# Altium PCB PCB1.PcbDoc (part 1 of 2)
Units mil, origin at the board's own origin, x right, y up, seen from the top; angles counter-clockwise.
Board outline 7000 x 5000 mil, 3 copper layers (Top Layer, GND, Bottom Layer), stack 19.578 mil thick; 137 components, 117 nets, 425 pads, 17 vias.
Unrouted connection lines stored in the file: 185.
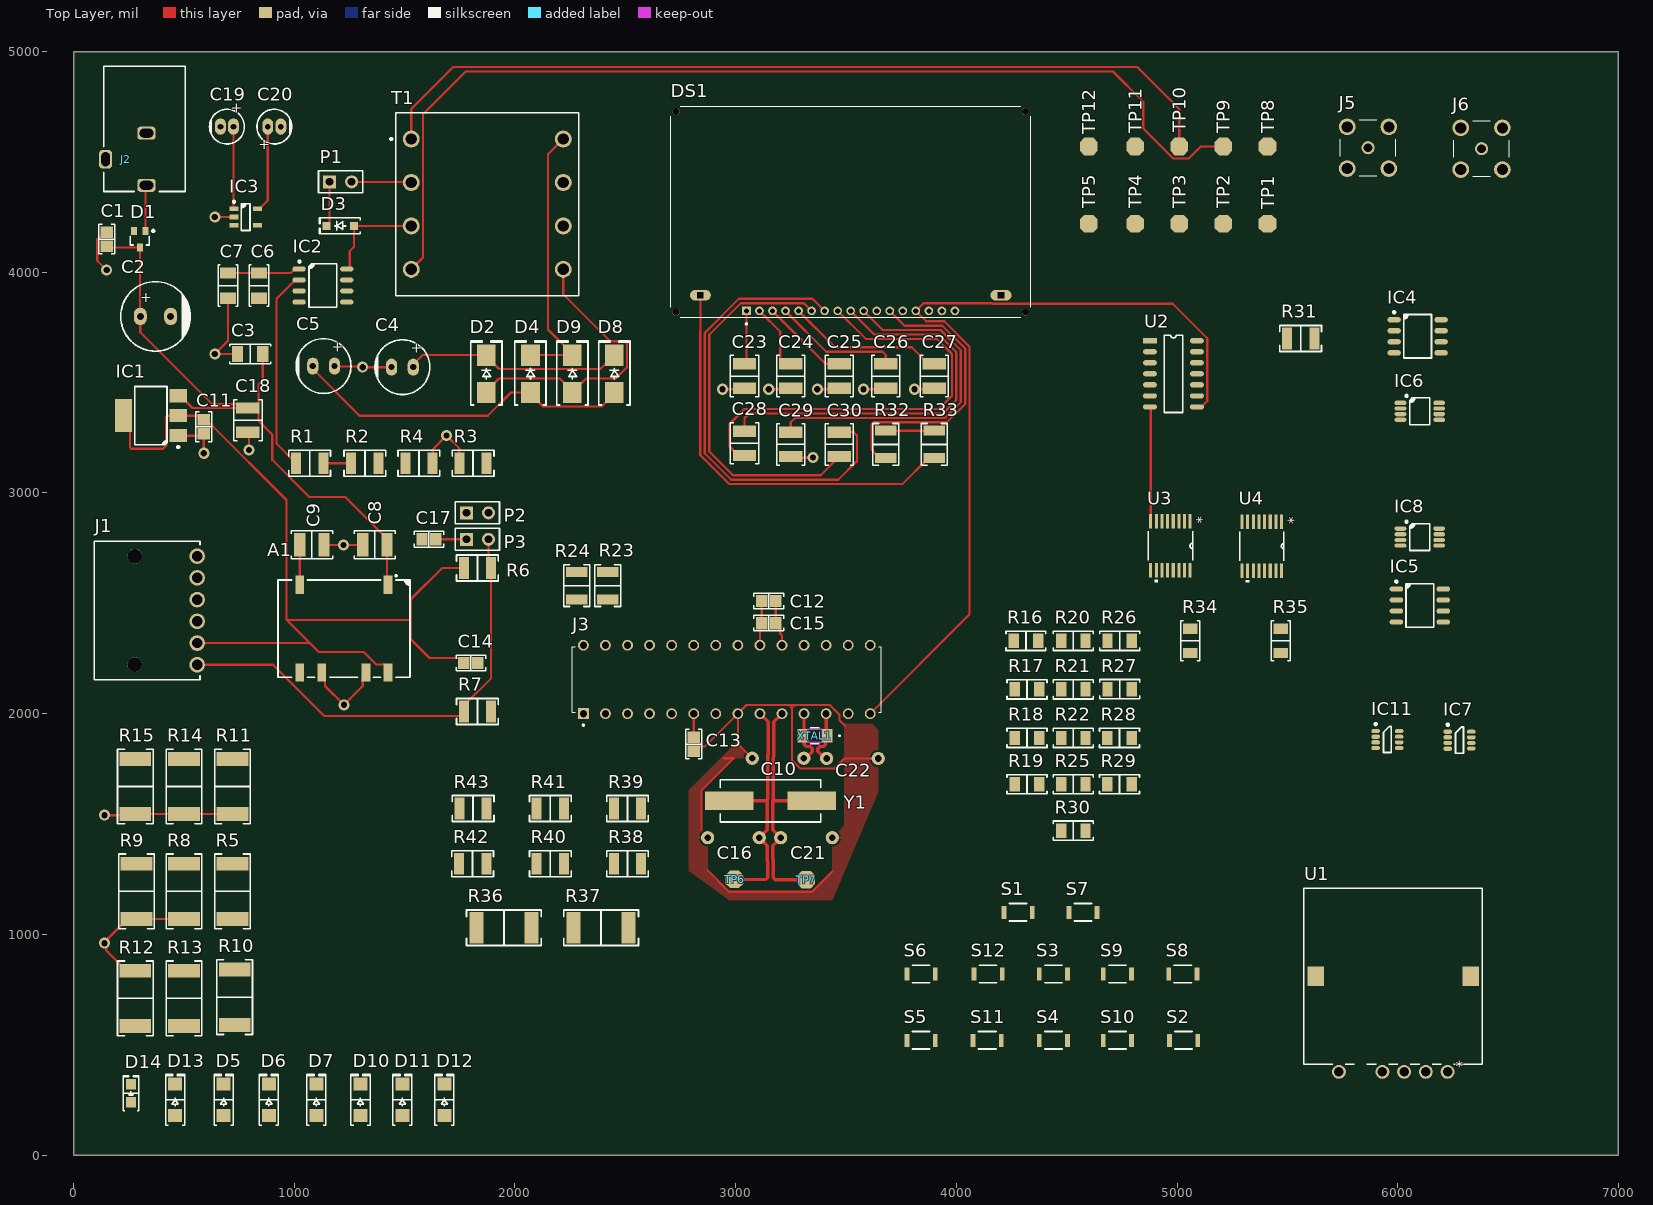
[diagram p0: Top Layer view]
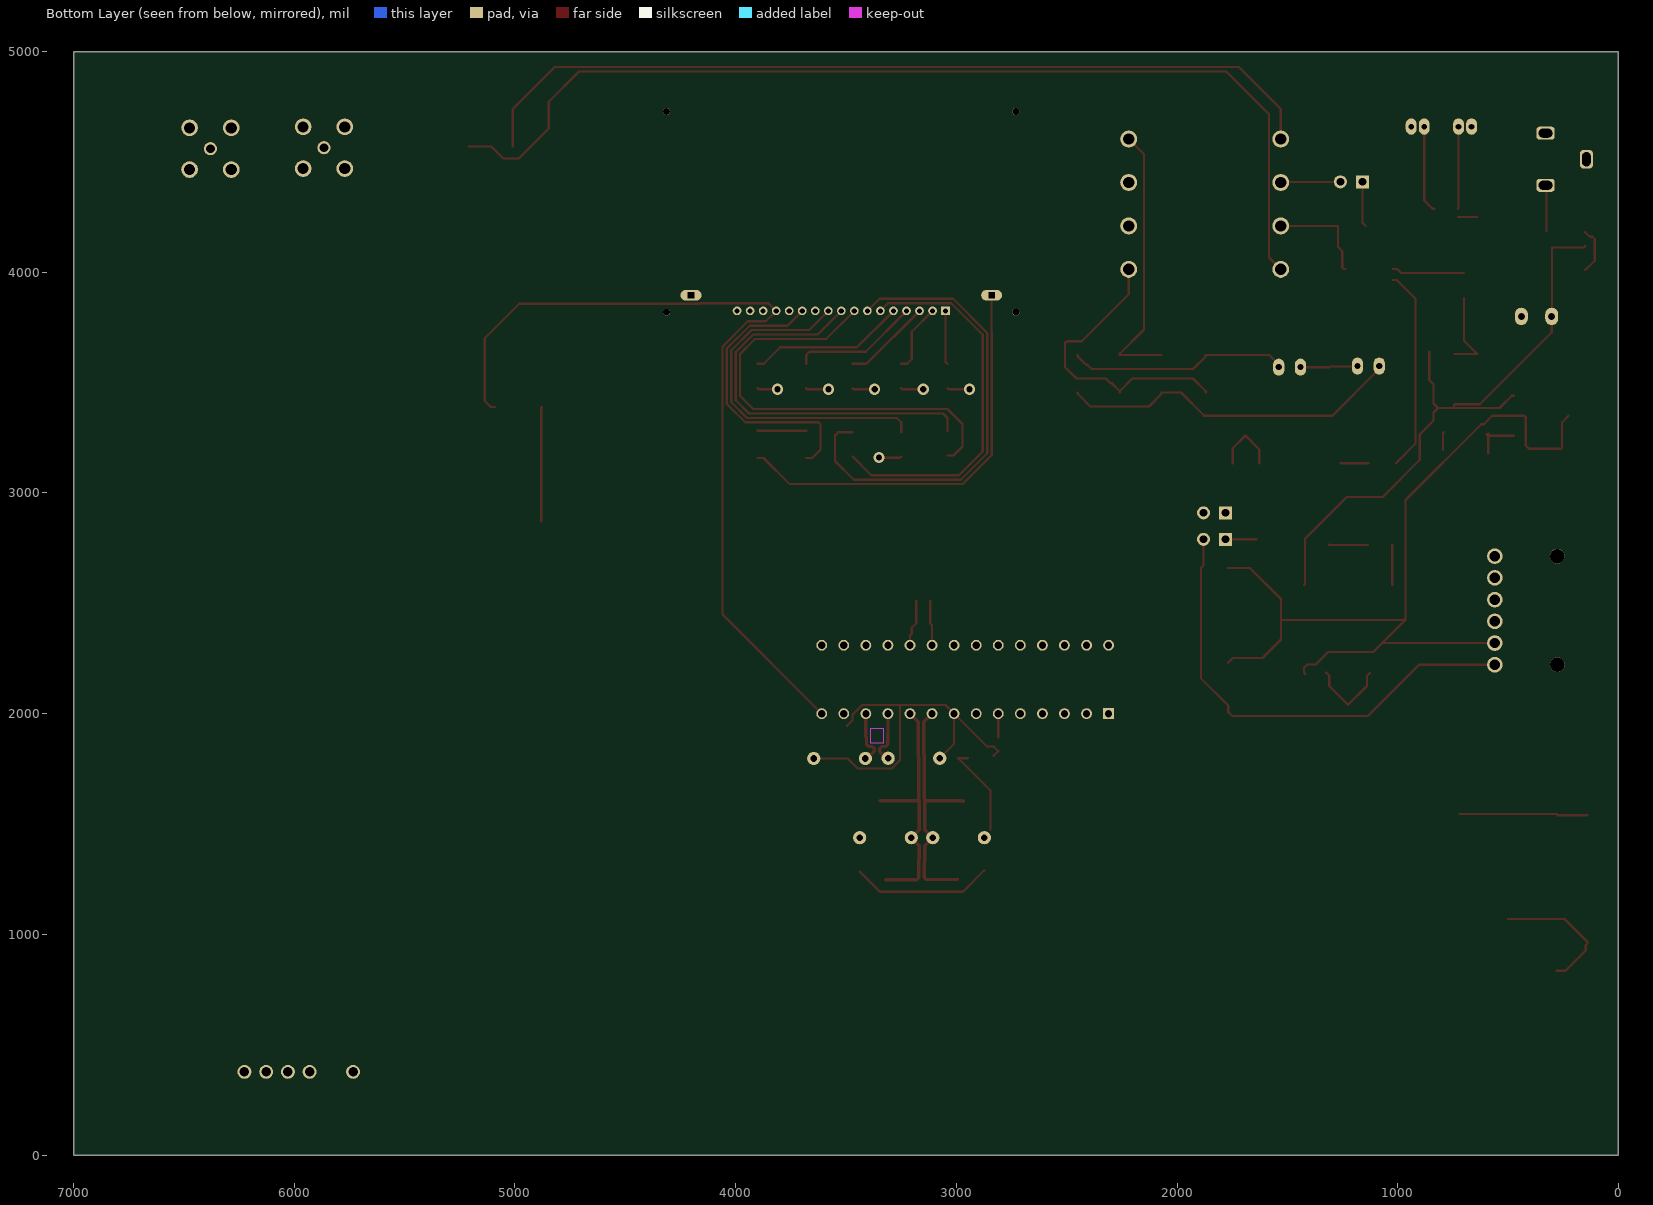
[diagram p1: Bottom Layer view, seen from below]
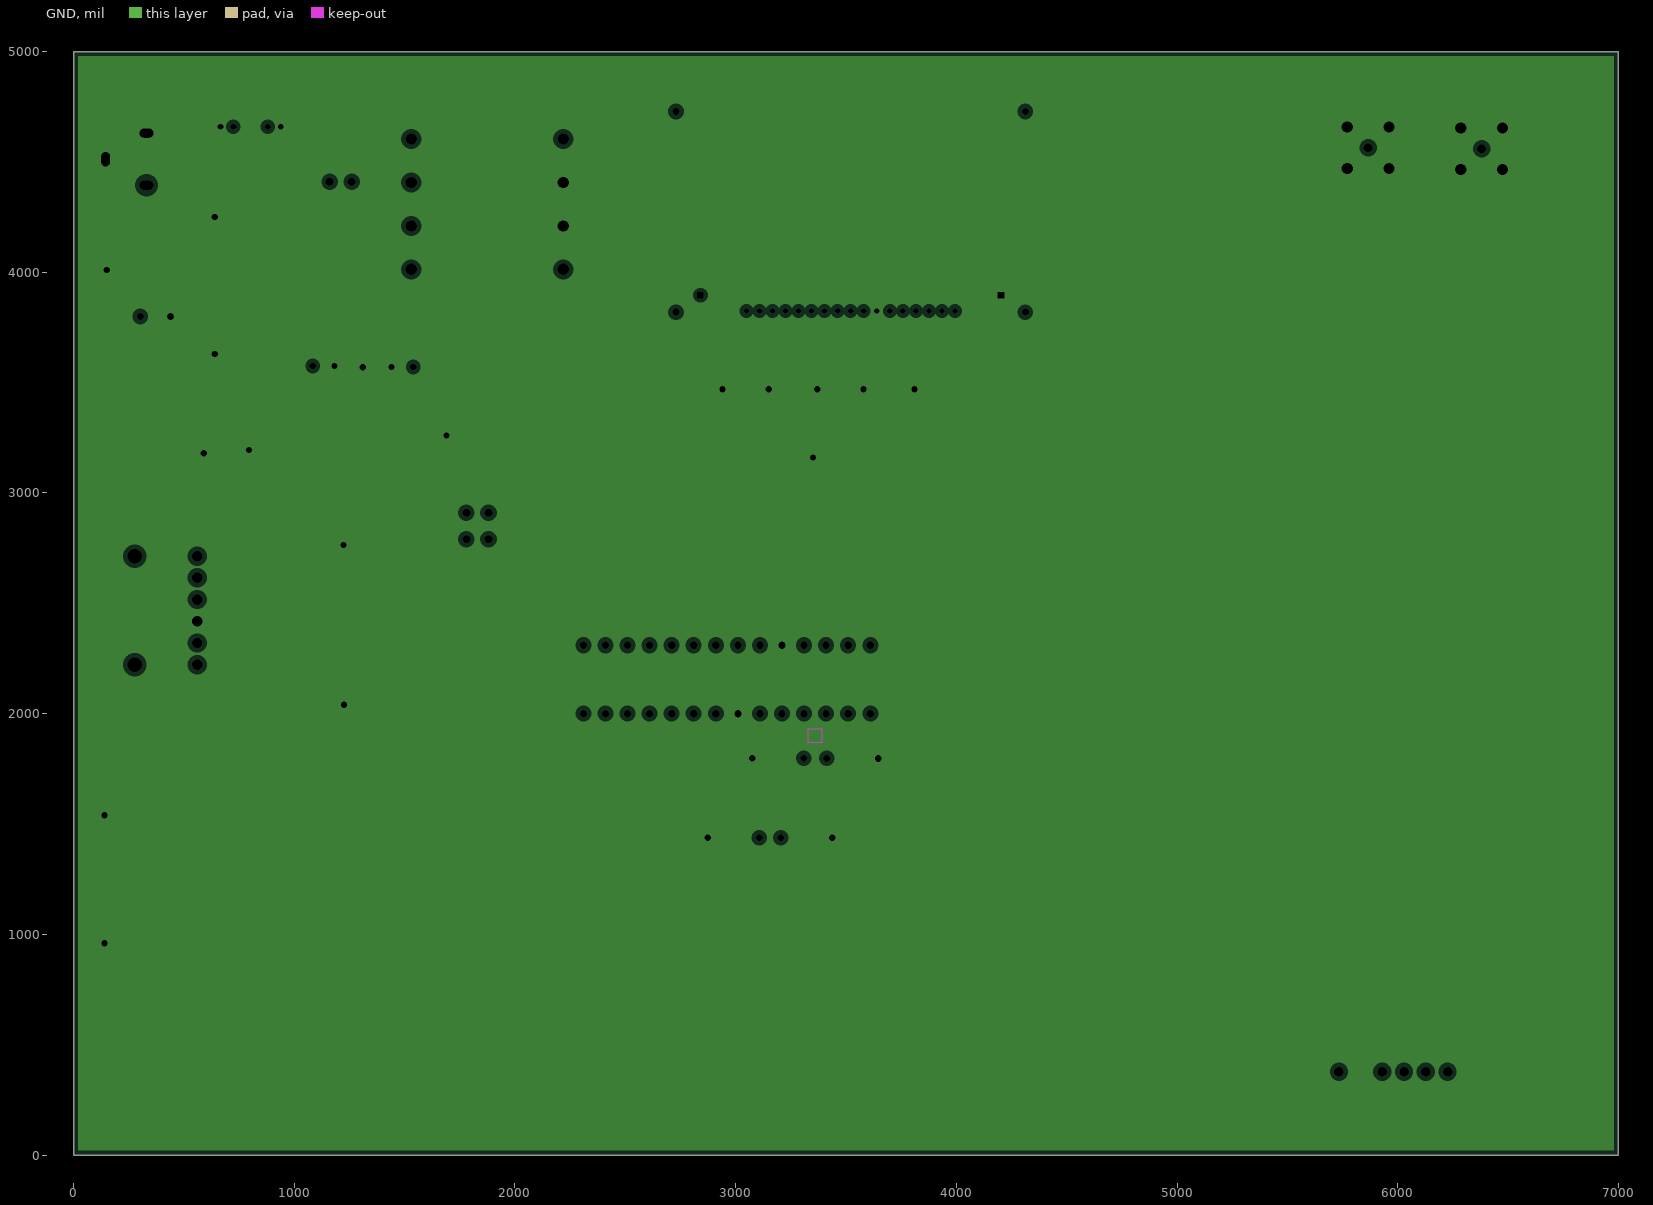
[diagram p2: GND, clearances drawn from the general rule]

## Layer stack, top to bottom
Top Solder: solder mask 0.4, Solder Resist, Dk 3.5
Top Layer: signal copper 1.4
Dielectric 2: prepreg 2.8, PP-006, Dk 4.1
GND: plane copper 1.378, net GND
Dielectric 1: dielectric 12.6, FR-4, Dk 4.8
Bottom Layer: signal copper 1.4
Bottom Solder: solder mask 0.4, Solder Resist, Dk 3.5

## Board outline
0,0 7000,0 7000,5000 0,5000

## Design rules (kind name [scope] priority, off if disabled: settings)
Clearance [All] p1: gap=10 ignorepadtopadclearanceinfootprint=FALSE except(0: Arc-Hole Track-Hole SMDPad-Hole THPad-Hole Via-Hole Fill-Hole Poly-Hole Region-Hole Text-Hole)
DiffPairsRouting X_DiffPair_DiffPairsRouting [InDifferentialPair ('X')] p1: maxlimit=10 minlimit=10 mostfreqgap=10 toplayer_minwidth=15 toplayer_maxwidth=15 toplayer_prefwidth=15 bottomlayer_minwidth=15 bottomlayer_maxwidth=15 bottomlayer_prefwidth=15 maxuncoupledlength=500
DiffPairsRouting [All] p2: maxlimit=10 minlimit=10 mostfreqgap=10 toplayer_minwidth=15 toplayer_maxwidth=15 toplayer_prefwidth=15 bottomlayer_minwidth=15 bottomlayer_maxwidth=15 bottomlayer_prefwidth=15 maxuncoupledlength=500
MatchedLengths X_DiffPair_MatchedLengths [InDifferentialPair ('X')] p1: tolerance=1000 checknetsindiffpair=TRUE checkdiffpairvsdiffpair=FALSE checkxsignals=FALSE checkothers=FALSE
PlaneClearance [All] p1: clearance=20
PlaneConnect [All] p1: planeconnectstyle=Relief reliefexpansion=20 reliefentries=4 reliefconductorwidth=10 reliefairgap=10
PolygonConnect [All] p1: connectstyle=Relief reliefconductorwidth=10 reliefentries=4 polygonreliefangle="90 Angle" airgapwidth=10
RoutingVias [All] p1: holewidth=28 width=50 viastyle="Through Hole" minholewidth=28 minwidth=50 maxholewidth=28 maxwidth=50
SolderMaskExpansion [All] p1: expansion=4 istentingtop=FALSE
Width [All] p1: maxlimit=10 minlimit=10 preferedwidth=10
27 further rules are at their usual default settings.

## Classes and differential pairs
net class Y_P: Y_P
net class Y_N: Y_N
net class X_P: X_P
net class X_N: X_N
component class "Shift register map": C23 C24 C25 C26 C27 C28 C29 C30 DS1 R31 R32 R33 R34 R35 U2 U3 U4
component class "Power management": A1 C1 C2 C3 C4 C5 C6 C7 C8 C9 C18 C19 C20 D1 D2 D3 D4 D5 D6 D7 D8 D9 D10 D11 D12 IC1 IC2 IC3 J2 P1 R1 R2 R3 R4 R5 R8 R9 R10 R11 R12 R13 R14 R15 T1 TP1 TP2 TP3 TP4 TP5 TP6 TP7 TP8 TP9 TP10 TP11 TP12
component class PIC: C10 C11 C12 C13 C14 C15 C16 C17 C21 C22 D13 D14 J1 J3 P2 P3 R6 R7 R23 R24 R36 R37 R38 R39 R40 R41 R42 R43 XTAL1 Y1
component class Oscillator: IC4 IC5 IC6 IC8 J5 J6
component class Interface: IC7 IC11 R16 R17 R18 R19 R20 R21 R22 R25 R26 R27 R28 R29 R30 S1 S2 S3 S4 S5 S6 S7 S8 S9 S10 S11 S12 U1
differential pair Y_Y: +Y_P -Y_N
differential pair X: +X_P -X_N

## Components (designator, comment, footprint, x,y, rotation, side; value= is the part's Value field where it differs from the comment)
A1 "V7806-1000-SMT-TR" "CUI V78" 1225,2385 r270 top
C1 "0.1 µF" "CAP 0805_2012" 150,4150 r270 top
C2 "2.2 µF" "CAP AL TH D8 L3.5 H12.5" 371.1,3800 r0 top
C3 "1µF" "CAP 1206_3216 - 1.0MM" 800,3630 r0 top
C4 "47µF" "CAP TH ALUM ELEC D6.30mm S2.50mm H12.70mm" 1490,3570 r0 top
C5 "47µF" "CAP TH ALUM ELEC D6.30mm S2.50mm H12.70mm" 1133,3575 r0 top
C6 "0.047 µF" "CAP 1206_3216 - 0.8MM" 840,3940 r90 top
C7 "4700 pF" "CAP 1206_3216 - 0.8MM" 700,3940 r90 top
C8 "10 µF" "CAP 1210_3225 - 1MM" 1365,2765 r0 top
C9 "22µF" "CAP 1210_3225 - 2.8MM" 1079.88,2765 r180 top
C10 "15pF" "CAP MICA 27PF" 3192,1798 r0 top
C11 "0.1 µF" "CAP 0805_2012" 590,3300 r270 top
C12 "0.1 µF" "CAP 0805_2012" 3150,2510 r180 top
C13 "0.1 µF" "CAP 0805_2012" 2810,1861.5 r90 top
C14 "0.1 µF" "CAP 0805_2012" 1800,2230 r180 top
C15 "0.1 µF" "CAP 0805_2012" 3150,2410 r180 top
C16 "27pF" "CAP MICA 27PF" 2990,1438 r0 top
C17 "0.1 µF" "CAP 0805_2012" 1610,2790 r0 top
C18 "0.1 µF" "CAP 1210_3225 - 1MM" 790,3330 r90 top
C19 "1µF" "CAP TH ALUM ELEC D4.00mm S1.50mm H6.00mm" 695,4660 r0 top
C20 "4.7µF" "CAP TH ALUM ELEC D4.00mm S1.50mm H6.00mm" 909.53,4660 r180 top
C21 "27pF" "CAP MICA 27PF" 3321,1438 r180 top
C22 "15pF" "CAP MICA 27PF" 3529,1797 r180 top
C23 "0.1 µF" "CAP 1210_3225 - 1MM" 3040,3530 r270 top
C24 "0.1 µF" "CAP 1210_3225 - 1MM" 3250,3530 r270 top
C25 "0.1 µF" "CAP 1210_3225 - 1MM" 3470,3530 r270 top
C26 "0.1 µF" "CAP 1210_3225 - 1MM" 3680,3530 r270 top
C27 "0.1 µF" "CAP 1210_3225 - 1MM" 3900,3530 r270 top
C28 "1 µF" "CAP 1210_3225 - 1MM" 3040,3225.12 r90 top
C29 "1 µF" "CAP 1210_3225 - 1MM" 3250,3220 r90 top
C30 "1 µF" "CAP 1210_3225 - 1MM" 3470,3220 r90 top
D1 "M1MA141KT1G" "DIODES SOT-323-3" 300,4150 r270 top
D2 "MBRS140T3G" "DO214AA SMB" 1870,3540 r90 top
D3 "1N4148W-7-F" SOD-123 1207.99,4210 r180 top
D4 "MBRS140T3G" "DO214AA SMB" 2070,3540 r90 top
D5 "Green" "LED 1206_3216 GREEN" 680,250 r90 top
D6 "Green" "LED 1206_3216 GREEN" 885,250 r90 top
D7 "Green" "LED 1206_3216 GREEN" 1100,250 r90 top
D8 "MBRS140T3G" "DO214AA SMB" 2450,3540 r90 top
D9 "MBRS140T3G" "DO214AA SMB" 2260,3540 r90 top
D10 "Green" "LED 1206_3216 GREEN" 1300,250 r90 top
D11 "Green" "LED 1206_3216 GREEN" 1490,250 r90 top
D12 "Green" "LED 1206_3216 GREEN" 1680,250 r90 top
D13 "Green" "LED 1206_3216 GREEN" 460,250 r90 top
D14 "Yellow" "LED 0805_2012 YELLOW" 260,280 r90 top
DS1 "NHD-C12832A1Z-FSW-FBW-3V3" LCD_NHD-C12832A1Z-FSW-FBW-3V3 3521.22,4273.82 r0 top
IC1 "LD1117S33TR" "ST SOT-223" 350,3350 r180 top
IC2 "CS5171EDR8G" "ON SEMI SO-8" 1130,3940 r0 top
IC3 "TPS76350DBVR" "TI SOT-23-5 DBV" 780,4250 r0 top
IC4 "LM2904DR" "TI SOIC-8 D" 6090,3710 r0 top
IC5 "LM2904DR" "TI SOIC-8 D" 6100,2490 r0 top
IC6 "DAC081S101CIMM/NOPB" "TI VSSOP-8 DGK" 6100,3370 r0 top
IC7 "AD5160BRJZ100-R2" "ANALOG SOT-23-8 RJ-8" 6280,1880 r0 top
IC8 "DAC081S101CIMM/NOPB" "TI VSSOP-8 DGK" 6100,2800 r0 top
IC11 "AD5160BRJZ100-R2" "ANALOG SOT-23-8 RJ-8" 5953.15,1882.8 r0 top
J1 "1053131106" "MOLEX 1053131106" 315.91,2467.64 r90 top
J2 "PJ-102AH" "CUI PJ-102AH" 330,4650 r0 top
J3 "PIC18F24J11-I/SP" DIP787W45P254L3556H508Q28 2960,2155 r90 top
J5 "SMA_CONNECTOR" LPRS_SMA_CONNECTOR 5865.51,4564.49 r270 top
J6 "SMA_CONNECTOR" LPRS_SMA_CONNECTOR 6380,4560 r270 top
P1 "Header 2" HDR1X2 1160,4410 r0 top
P2 "Header 2" HDR1X2 1780,2910 r0 top
P3 "Header 2" HDR1X2 1780,2790 r0 top
R1 "715 Ohms" "RES 1210_3225" 1070,3135 r0 top
R2 "10 kOhms" "RES 1210_3225" 1320,3135 r0 top
R3 "1.27 kOhms" "RES 1210_3225" 1810,3135 r0 top
R4 "2 kOhms" "RES 1210_3225" 1565,3135 r180 top
R5 "100 Ohms" "RES 2512_6432" 720,1195 r90 top
R6 "10 kOhms" "RES 1210_3225" 1830,2660 r180 top
R7 "470 kOhms" "RES 1210_3225" 1830,2010 r180 top
R8 "28 Ohms" "RES 2512_6432" 500,1195 r90 top
R9 "215 kOhms" "RES 2512_6432" 285,1195 r90 top
R10 "100 Ohms" "RES 2512_6432" 730,715 r270 top
R11 "215 kOhms" "RES 2512_6432" 720,1670 r90 top
R12 "100 Ohms" "RES 2512_6432" 280,710 r90 top
R13 "215 kOhms" "RES 2512_6432" 500,710 r90 top
R14 "82 Ohms" "RES 2512_6432" 500,1670 r90 top
R15 "130 Ohms" "RES 2512_6432" 280,1670 r90 top
R16 "3.3 MOhms" "RES 1206_3216" 4315.12,2330 r0 top
R17 "3.3 kOhms" "RES 1206_3216" 4320,2110 r0 top
R18 "3.3 MOhms" "RES 1206_3216" 4320,1890 r0 top
R19 "3.3 MOhms" "RES 1206_3216" 4320,1680 r0 top
R20 "3.3 MOhms" "RES 1206_3216" 4530,2330 r0 top
R21 "3.3 MOhms" "RES 1206_3216" 4530,2110 r0 top
R22 "3.3 MOhms" "RES 1206_3216" 4530,1890 r0 top
R23 "30 Ohms" "RES 1210_3225" 2420,2580 r90 top
R24 "30 Ohms" "RES 1210_3225" 2280,2580 r90 top
R25 "3.3 MOhms" "RES 1206_3216" 4530,1680 r0 top
R26 "3.3 MOhms" "RES 1206_3216" 4740,2330 r0 top
R27 "3.3 MOhms" "RES 1206_3216" 4740,2111 r0 top
R28 "3.3 MOhms" "RES 1206_3216" 4739,1890 r0 top
R29 "3.3 MOhms" "RES 1206_3216" 4739,1680 r0 top
R30 "3.3 MOhms" "RES 1206_3216" 4530,1470 r0 top
R31 "820 kOhms" "RES 1210_3225" 5560,3700 r0 top
R32 "10 kOhms" "RES 1210_3225" 3680,3220 r90 top
R33 "10 kOhms" "RES 1210_3225" 3900,3220 r90 top
R34 "40.2 kOhms" "RES 1206_3216" 5060,2330 r270 top
R35 "40.2 kOhms" "RES 1206_3216" 5470,2330 r270 top
R36 "28 Ohms" "RES 2512_6432" 1950,1030 r180 top
R37 "28 Ohms" "RES 2512_6432" 2390,1030 r0 top
R38 "10 kOhms" "RES 1210_3225" 2510,1320 r180 top
R39 "10 kOhms" "RES 1210_3225" 2510,1570 r180 top
R40 "10 kOhms" "RES 1210_3225" 2160,1320 r180 top
R41 "10 kOhms" "RES 1210_3225" 2160,1570 r180 top
R42 "10 kOhms" "RES 1210_3225" 1807.99,1320 r180 top
R43 "10 kOhms" "RES 1210_3225" 1810,1570 r180 top
S1 "KXT 331 LHS" "C&K KXT3" 4280,1100 r0 top
S2 "KXT 331 LHS" "C&K KXT3" 5030,520 r0 top
S3 "KXT 331 LHS" "C&K KXT3" 4440,820 r0 top
S4 "KXT 331 LHS" "C&K KXT3" 4440,520 r0 top
S5 "KXT 331 LHS" "C&K KXT3" 3840,520 r0 top
S6 "KXT 331 LHS" "C&K KXT3" 3840,820 r0 top
S7 "KXT 331 LHS" "C&K KXT3" 4573.98,1100 r0 top
S8 "KXT 331 LHS" "C&K KXT3" 5026.02,820 r0 top
S9 "KXT 331 LHS" "C&K KXT3" 4730,820 r0 top
S10 "KXT 331 LHS" "C&K KXT3" 4730,520 r0 top
S11 "KXT 331 LHS" "C&K KXT3" 4140,520 r0 top
S12 "KXT 331 LHS" "C&K KXT3" 4143.98,820 r0 top
T1 "Ui = 30-57V, Uo1 = 12V/5A, Uo2 = -12V/1.6A" WE-PoE++_EFD20_THT_L21.08W21.08H10.8 1874.49,4308.43 r0 top
TP1 "TP_1" Test_point_1 5410,4220 r180 top
TP2 "TP_1" Test_point_1 5210,4220 r180 top
TP3 "TP_1" Test_point_1 5010,4220 r180 top
TP4 "TP_1" Test_point_1 4810,4220 r180 top
TP5 "TP_1" Test_point_1 4600,4220 r180 top
TP6 "TP_1" Test_point_1 2995,1249 r0 top
TP7 "TP_1" Test_point_1 3320,1248 r0 top
TP8 "TP_1" Test_point_1 5410,4570 r180 top
TP9 "TP_1" Test_point_1 5210,4570 r180 top
TP10 "TP_1" Test_point_1 5010,4570 r270 top
TP11 "TP_1" Test_point_1 4810,4570 r270 top
TP12 "TP_1" Test_point_1 4600,4570 r270 top
U1 "EVQ-V9C00116E" SW_EVQ-V9C00116E_PAN 6225.67,376.93 r0 top
U2 "SN74HC164DR" SOP14 4877.4,3690 r0 top
U3 "SN74HC165PWR" PW16 4970,2760 r270 top
U4 "SN74HC165PWR" PW16 5383.98,2759 r270 top
XTAL1 "SC32S-7PF20PPM" XTAL_SC32S-7PF20PPM_EPS 3359,1900 r180 top
Y1 "4MHz" "ABRACON ABLS" 3157.99,1605 r180 top

## Footprints (in the part's own frame and the unit in brackets; to place one, negate y for a bottom-side part, rotate by r counter-clockwise, add the part's x,y. Pads: shape width x height; smd on the part's side, far side on the other; paste and mask are expansions set on the pad)
"ABRACON ABLS" [mm] "Crystal, 2-Leads, Body 4.70x11.40mm, Pitch 8.80mm, IPC Medium Density"
  rect 5.6x2.1 smd: 1(-4.75,0) 2(4.75,0)
  silkscreen extent -5.77,-2.43 5.77,2.43, body extent -6.35,-2.35 6.35,2.35, height 4.2
"ANALOG SOT-23-8 RJ-8" [mm] "SOT-23-8, 8-Leads, Body 2.90x1.60mm, Pitch 0.65mm, IPC Medium Density"
  oval 1x0.5 smd: 1(-1.35,0.975) 2(-1.35,0.325) 3(-1.35,-0.325) 4(-1.35,-0.975)
  oval 1x0.45 smd: 5(1.35,-0.975) 6(1.35,-0.325) 7(1.35,0.325) 8(1.35,0.975)
  silkscreen extent -1.47,-1.5 0.45,1.9, body extent -1.4,-1.5 1.4,1.5, height 1.45
"C&K KXT3" [mm]
  rect 0.55x1.5 smd: 1(-1.625,0) 2(1.625,0)
  silkscreen extent -1,-1 1,1, body extent -1.75,-1 1.75,1, height 0.58
"CAP 0805_2012" [mm] "Chip Capacitor, 2-Leads, Body 2.00x1.20mm, IPC Medium Density"
  rect 1.3x1.4 smd: 1(-0.8,0) 2(0.8,0)
  silkscreen extent -1.7,-0.9 1.7,0.9, body extent -1,-0.64 1,0.64, height 1.26
"CAP 1206_3216 - 0.8MM" [mm] "Chip Capacitor, 2-Leads, Body 3.25x1.60mm, IPC Medium Density"
  rect 1.3x1.8 smd: 1(-1.45,0) 2(1.45,0)
  silkscreen extent -2.37,-1.12 2.37,1.12, body extent -1.6,-0.8 1.6,0.8, height 0.8
"CAP 1206_3216 - 1.0MM" [mm] "Chip Capacitor, 2-Leads, Body 3.25x1.60mm, IPC Medium Density"
  rect 1.3x1.8 smd: 1(-1.45,0) 2(1.45,0)
  silkscreen extent -2.37,-1.12 2.37,1.12, body extent -1.6,-0.8 1.6,0.8, height 1
"CAP 1210_3225 - 1MM" [mm] "Chip Capacitor, 2-Leads, Body 3.20x2.50mm, IPC Medium Density"
  rect 1.3x2.7 smd: 1(-1.4,0) 2(1.4,0)
  silkscreen extent -2.37,-1.63 2.37,1.63, body extent -1.6,-1.25 1.6,1.25, height 1
"CAP 1210_3225 - 2.8MM" [mm] "Chip Capacitor, 2-Leads, Body 3.20x2.50mm, IPC Medium Density"
  rect 1.3x2.7 smd: 1(-1.4,0) 2(1.4,0)
  silkscreen extent -2.37,-1.63 2.37,1.63, body extent -1.6,-1.25 1.6,1.25, height 2.8
"CAP AL TH D8 L3.5 H12.5" [mm] "8MM Diameter, 3.5MM Lead Spacing Aluminium Capacitor"
  oval 1.5x2 hole 0.8: 1(-1.75,0) 2(1.75,0)
  silkscreen extent -4,-4 4,4, body extent -4,-4 4,4, height 11.5
"CAP MICA 27PF" [mil]
  round 60 hole 30: 1(-117,0) 2(117,0)
"CAP TH ALUM ELEC D4.00mm S1.50mm H6.00mm" [mm] "4mm Diameter 1.5mm Lead Spacing Aluminum Electrolytic Capacitors Radial, Can"
  oval 1.25x1.875 hole 0.65: 1(0.75,0) 2(-0.75,0)
  silkscreen extent -2,-2 2,2, body extent -2.01,-2 2,2, height 6
"CAP TH ALUM ELEC D6.30mm S2.50mm H12.70mm" [mm] "6.3mm Diameter 2.5mm Lead Spacing Aluminum Electrolytic Capacitors Radial, Can"
  oval 1.3x1.95 hole 0.7: 1(1.25,0) 2(-1.25,0)
  silkscreen extent -3.15,-3.15 3.15,3.15, body extent -3.16,-3.15 3.15,3.15, height 12.7
"CUI PJ-102AH" [mm] "DC Barrel Jack W/ Switch 2.0x5.5"
  rrect50% 2.1x1.5 hole 1 slot 1.6 at 0 deg: 1(0,-6.5) 2(0,-0.5)
  rrect50% 1.5x2.1 hole 1 slot 1.6 at 90 deg: 3(-4.7,-3.5)
  silkscreen extent -4.92,-7.2 4.47,7.2, body extent -4.92,-7.2 4.47,7.2, height 11
"CUI V78" [mm] "Non-isolated switching regulator"
  rect 2.1x1 smd: 1(-5.05,5.08) 5(-5.05,-5.08) 6(5.05,-5.08) 7(5.05,-2.54) 9(5.05,2.54) 10(5.05,5.08)
  silkscreen extent -6.2,-7.6 5.6,7.6, body extent -5.62,-7.62 5.62,7.62, height 7.25
"DIODES SOT-323-3" [mm] "SOT323, 3-Leads, Body 2.00x2.10mm, Pitch 0.65mm, IPC Medium Density"
  rect 0.9x0.7 smd: 1(-0.95,0.65) 2(0.95,0) 3(-0.95,-0.65)
  silkscreen extent -1.07,-1.1 0.67,1.68, body extent -1.06,-1 1.06,1, height 1
DIP787W45P254L3556H508Q28 [mm]
  rect 1.25x1.25 / inner round 1.25 / far side rect 1.25x1.25 hole 0.83: 1(-3.937,16.51)
  round 1.25 hole 0.83: 2(-3.937,13.97) 3(-3.937,11.43) 4(-3.937,8.89) 5(-3.937,6.35) 6(-3.937,3.81) 7(-3.937,1.27) 8(-3.937,-1.27) 9(-3.937,-3.81) 10(-3.937,-6.35) 11(-3.937,-8.89) 12(-3.937,-11.43) 13(-3.937,-13.97) 14(-3.937,-16.51) 15(3.937,-16.51) 16(3.937,-13.97) 17(3.937,-11.43) 18(3.937,-8.89) 19(3.937,-6.35) 20(3.937,-3.81) 21(3.937,-1.27) 22(3.937,1.27) 23(3.937,3.81) 24(3.937,6.35) 25(3.937,8.89) 26(3.937,11.43) 27(3.937,13.97) 28(3.937,16.51)
  silkscreen extent -5.35,-17.78 3.75,17.78, body extent -4.06,-17.34 4.06,17.34, height 5.08
"DO214AA SMB" [mm] "Molded Diode, 2-Leads, Body 4.31x3.62mm, IPC Medium Density"
  rect 2.45x2.15 smd: 1(-2.15,0) 2(2.15,0)
  silkscreen extent -3.6,-1.8 3.8,1.8, body extent -2.6,-1.8 2.6,1.8, height 2.4
HDR1X2 [mm] "Connector; Header; 2 Position"
  rect 1.5x1.5 hole 0.9: 1(0,0)
  round 1.5 hole 0.9: 2(2.54,0)
  silkscreen extent -1.27,-1.27 3.81,1.27
LCD_NHD-C12832A1Z-FSW-FBW-3V3 [mm]
  rect 1x1 hole 0.6: 1(-12,-11.4)
  round 1 hole 0.6: 2(-10.5,-11.4) 3(-9,-11.4) 4(-7.5,-11.4) 5(-6,-11.4) 6(-4.5,-11.4) 7(-3,-11.4) 8(-1.5,-11.4) 9(0,-11.4) 10(1.5,-11.4) 11(3,-11.4) 12(4.5,-11.4) 13(6,-11.4) 14(7.5,-11.4) 15(9,-11.4) 16(10.5,-11.4) 17(12,-11.4)
  oval 2.416x1.208 hole 0.7 square: A(-17.3,-9.6) K(17.3,-9.6)
  round 0.8 hole 0.8 unplated: ""(-20.1,-11.55) ""(-20.1,11.55) ""(20.1,-11.55) ""(20.1,11.55)
  silkscreen extent -20.7,-13 20.7,12.15
"LED 0805_2012 YELLOW" [mm] "Chip Diode, 2-Leads, Body 2.00x1.25mm, IPC Medium Density"
  rect 1.2x1.2 smd: 1(-1.05,0) 2(1.05,0)
  silkscreen extent -2.03,-0.9 2.03,0.9, body extent -1,-0.62 1,0.63, height 0.9
"LED 1206_3216 GREEN" [mm] "Chip Diode, 2-Leads, Body 3.13x1.55mm, IPC Medium Density"
  rect 1.5x1.6 smd: 1(-1.8,0) 2(1.8,0)
  silkscreen extent -2.92,-1.1 2.92,1.1, body extent -1.6,-0.8 1.6,0.8, height 0.9
LPRS_SMA_CONNECTOR [mm]
  round 1.508 hole 1: 1(0,0)
  round 1.92 hole 1.28: G1(-2.4,2.4) G2(-2.4,-2.4) G3(2.4,-2.4) G4(2.4,2.4)
  silkscreen extent -3.2,-3.2 3.2,3.2, body extent -3.25,-3.25 3.25,3.25, height 13.6
"MOLEX 1053131106" [mm] "Connector Header Through Hole, Right Angle 6 position, 2mm Pitch, 15.94x8.64 mm Body"
  round 1.8 hole 1.2: 1(-6.25,-6.2) 2(-3.75,-6.2) 3(-1.25,-6.2) 4(1.25,-6.2) 5(3.75,-6.2) 6(6.25,-6.2)
  round 1.7 hole 1.7: SH(-6.25,0.98) SH(6.25,0.98)
  silkscreen extent -7.97,-6.52 7.97,5.64, body extent -7.97,-6.52 7.97,5.64, height 6.64
"ON SEMI SO-8" [mm] "SOIC, 8-Leads, Body 4.90x3.90mm, Pitch 1.27mm, IPC Medium Density"
  oval 1.52x0.6 smd: 1(-2.74,1.905) 2(-2.74,0.635) 3(-2.74,-0.635) 4(-2.74,-1.905) 5(2.74,-1.905) 6(2.74,-0.635) 7(2.74,0.635) 8(2.74,1.905)
  silkscreen extent -2.82,-2.5 1.6,2.88, body extent -3.01,-2.45 3.01,2.45, height 1.5
PW16 [mil]
  rect 66x14 smd paste-33 mask-33: 1(-111,89.57) 2(-111,63.98) 3(-111,38.39) 4(-111,12.8) 5(-111,-12.8) 6(-111,-38.39) 7(-111,-63.98) 8(-111,-89.57) 9(111,-89.57) 10(111,-63.98) 11(111,-38.39) 12(111,-12.8) 13(111,12.8) 14(111,38.39) 15(111,63.98) 16(111,89.57)
  silkscreen extent -66,-101 164,101, body extent -130,-101 130,101, height 47
"RES 1206_3216" [mm] "Chip Resistor, 2-Leads, Body 3.13x1.55mm, IPC Medium Density"
  rect 1.2x1.65 smd: 1(-1.4,0) 2(1.4,0)
  silkscreen extent -2.3,-1.1 2.3,1.1, body extent -1.6,-0.8 1.6,0.8, height 0.6
"RES 1210_3225" [mm] "Chip Resistor, 2-Leads, Body 3.1x2.6mm, IPC Medium Density"
  rect 1.15x2.5 smd: 1(-1.575,0) 2(1.575,0)
  silkscreen extent -2.4,-1.5 2.4,1.5, body extent -1.6,-1.25 1.6,1.25, height 0.7
"RES 2512_6432" [mm] "Chip Resistor, 2-Leads, Body 6.30x3.15mm, IPC Medium Density"
  rect 1.6x3.65 smd: 1(-3.175,0) 2(3.175,0)
  silkscreen extent -4.3,-2.05 4.3,2.05, body extent -3.15,-1.57 3.15,1.57, height 0.7
SOD-123 [mm] "SOD, 2-Leads, Body 1.55x3.70mm, IPC Medium Density"
  rect 0.9x0.95 smd: 1(-1.575,0) 2(1.575,0)
  silkscreen extent -2.3,-0.92 2.41,0.92, body extent -1.86,-0.78 1.86,0.77, height 1.35
SOP14 [mm]
  rect 1.6x0.6 smd: 1(0,0)
  oval 1.6x0.6 smd: 2(0,-1.27) 3(0,-2.54) 4(0,-3.81) 5(0,-5.08) 6(0,-6.35) 7(0,-7.62) 8(5.4,-7.62) 9(5.4,-6.35) 10(5.4,-5.08) 11(5.4,-3.81) 12(5.4,-2.54) 13(5.4,-1.27) 14(5.4,0)
  silkscreen extent 1.63,-8.25 3.77,0.64
"ST SOT-223" [mm] "SOT223, 4-Leads, Body 6.50x7.00mm (avg), Pitch 2.30mm, IPC Medium Density"
  rect 2x1.5 smd: 1(-3.15,2.3) 2(-3.15,0) 3(-3.15,-2.3)
  rect 2x3.8 smd: 4(3.15,0)
  silkscreen extent -3.27,-3.35 1.85,3.72, body extent -3.52,-3.25 3.5,3.25, height 1.8
SW_EVQ-V9C00116E_PAN [mil]
  round 63 / inner round 60 / far side round 63 hole 43 paste-31.5 mask+0: 1(0,0) 2(-492.13,0) 3(-98.43,0) 4(-295.28,0) 5(-196.85,0)
  rect 75x87 smd paste-43.5 mask-43.5: 6(-596.46,433.07) 7(104.33,433.07)
  silkscreen extent -651,35 158,832
Test_point_1 [mil] "TP_1"
  oct 80x80 smd: TP1(0,0)
"TI SOIC-8 D" [mm] "SOP, 8-Leads, Body 4.90x3.90mm, Pitch 1.27mm, IPC Medium Density"
  oval 1.55x0.6 smd: 1(-2.7,1.905) 2(-2.7,0.635) 3(-2.7,-0.635) 4(-2.7,-1.905) 5(2.7,-1.905) 6(2.7,-0.635) 7(2.7,0.635) 8(2.7,1.905)
  silkscreen extent -2.82,-2.5 1.6,2.88, body extent -3.01,-2.45 3.01,2.45, height 1.5
"TI SOT-23-5 DBV" [mm] "SOT23, 5-Leads, Body 2.90x2.80mm, Pitch 0.95mm, IPC Medium Density"
  rect 1x0.55 smd: 1(-1.35,0.95) 2(-1.35,0) 3(-1.35,-0.95) 4(1.35,-0.95) 5(1.35,0.95)
  silkscreen extent -1.47,-1.55 0.5,1.9, body extent -1.44,-1.43 1.39,1.48, height 1.5
"TI VSSOP-8 DGK" [mm] "TSOP, 8-Leads, Body 3.00x3.00mm, Pitch 0.65mm, IPC Medium Density"
  oval 1.35x0.5 smd: 1(-2.225,0.975) 2(-2.225,0.325) 3(-2.225,-0.325) 4(-2.225,-0.975) 5(2.225,-0.975) 6(2.225,-0.325) 7(2.225,0.325) 8(2.225,0.975)
  silkscreen extent -1.65,-1.55 1.15,1.9, body extent -2.45,-1.5 2.45,1.5, height 1.1
WE-PoE++_EFD20_THT_L21.08W21.08H10.8 [mm] "Transformer, THT, body 21.08 x 21.08 mm"
  round 1.95 hole 1.3: 1(-8.75,7.5) 2(-8.75,2.5) 3(-8.75,-2.5) 4(-8.75,-7.5) 5(8.75,-7.5) 6(8.75,-2.5) 7(8.75,2.5) 8(8.75,7.5)
  silkscreen extent -11.17,-10.54 10.54,10.54, body extent -10.1,-10.1 10.1,10.1, height 10.45
XTAL_SC32S-7PF20PPM_EPS [mil]
  rect 46x63 smd paste+0 mask+0: 1(-56,0) 2(56,0)
  Top Layer keep-out region: -31,-29.5 -31,29.5 31,29.5 31,-29.5
  Keep-Out Layer region: -31,-31.5 -31,31.5 31,31.5 31,-31.5
  silkscreen extent -115,-36 21,36, body extent -65,-31 65,31, height 33

## Part data
A1: "DC DC CONVERTER 6.5V 7W", Part Number=V7806-1000-SMT-TR
C1 C11 C12 C13 C14 C15 C17: library part C0805X104K5RAC7210, ".100UF 50.0V", Device Package="0805 (2012 Metric)", manufacturer=KEMET, Operating Temperature="-55°C ~ 125°C", Supplier Part Number 1=399-C0805X104K5RAC7210CT-ND, Temperature Coefficient=X7R, Tolerance=±10%, Voltage - Rated=50V, Applications="Boardflex Sensitive", Capacitance="0.1 µF", componentlink1description=Datasheet, componentlink1url=https://connect.kemet.com:7667/gateway/IntelliData-ComponentDocumentation/1.0/download/datasheet/C0805X104K5RAC7210, componentlink2description="DigiKey Link", componentlink2url=https://www.digikey.com/en/products/detail/kemet/C0805X104K5RAC7210/12082600, Features="Soft Termination", lastupdated="9/02/2024 8:14:45 PM", Lifecycle Status=Active, Minimum Order=1, Mounting Type="Surface Mount, MLCC", Package / Case="0805 (2012 Metric)", packaging=TapeAndReel, Part Number=C0805X104K5RAC7210, Part Status=Active, partid=48810, price=0.05, series="SMD Comm X7R Flex", Size / Dimension="0.079\" L x 0.049\" W (2.00mm x 1.25mm)", Supplier 1=DigiKey, Thickness (Max)="0.039\" (0.98mm)"
C2: library part UVY2G2R2MPD, "CAP ALUM 2.2UF 20% 400V RADIAL", Device Package="Radial, Can", Lifetime @ Temp.="1000 Hrs @ 105°C", manufacturer=Nichicon, Operating Temperature="-40°C ~ 105°C", Ripple Current @ High Frequency="31.05 mA @ 10 kHz", Ripple Current @ Low Frequency="27 mA @ 120 Hz", Supplier Part Number 1=493-16197-ND, Tolerance=±20%, Voltage - Rated="400 V", Applications="General Purpose", Capacitance="2.2 µF", componentlink1description=Datasheet, componentlink1url=http://nichicon-us.com/english/products/pdfs/e-uvy.pdf, componentlink2description="DigiKey Link", componentlink2url=https://www.digikey.com/en/products/detail/nichicon/UVY2G2R2MPD/2539761, Height - Seated (Max)="0.492\" (12.50mm)", lastupdated="8/02/2024 9:38:05 PM", Lead Spacing="0.138\" (3.50mm)", Lifecycle Status=Active, Minimum Order=1, Mounting Type="Through Hole", Package / Case="Radial, Can", packaging=Bulk, Part Number=UVY2G2R2MPD, Part Status=Active, partid=7299, Polarization=Polar, price=0.15, series=UVY, Size / Dimension="0.315\" Dia (8.00mm)", Supplier 1=DigiKey
C3: library part 12065C105K4Z2A, "CAP CER 1UF 50V X7R 1206", Device Package="1206 (3216 Metric)", manufacturer="AVX Corporation", Operating Temperature="-55°C ~ 125°C", Ratings=AEC-Q200, Supplier Part Number 1=478-10886-1-ND, Temperature Coefficient=X7R, Tolerance=±10%, Voltage - Rated=50V, Applications="Automotive, Boardflex Sensitive", Capacitance=1µF, componentlink1description=Datasheet, componentlink1url=http://datasheets.avx.com/AutoMLCC.pdf, componentlink2description="DigiKey Link", componentlink2url=http://digikey.com/product-detail/en/avx-corporation/12065C105K4Z2A/478-10886-1-ND/7536455, Features="Soft Termination", lastupdated="2/09/2020 1:05:06 AM", Lifecycle Status=Active, Minimum Order=1, Mounting Type="Surface Mount, MLCC", Package / Case="1206 (3216 Metric)", packaging=TapeAndReel, Part Number=12065C105K4Z2A, Part Status=Active, partid=18944, price=0.12, series=FLEXITERM®, Size / Dimension="0.126\" L x 0.063\" W (3.20mm x 1.60mm)", Supplier 1=DigiKey, Thickness (Max)="0.037\" (0.94mm)"
C4 C5: library part EEU-FR1H470, "AL LYTIC, RADIAL, 50VDC, 47UF", Device Package="Radial, Can", Lifetime @ Temp.="5000 Hrs @ 105°C", manufacturer="Panasonic Electronic Components", Operating Temperature="-40°C ~ 105°C", Ripple Current @ High Frequency="405mA @ 100kHz", Ripple Current @ Low Frequency="283.5mA @ 120Hz", Supplier Part Number 1=P124235-ND, Tolerance=±20%, Voltage - Rated=50V, Applications="General Purpose", Capacitance=47µF, componentlink1description=Datasheet, componentlink1url=https://industrial.panasonic.com/cdbs/www-data/pdf/RDF0000/ABA0000C1022.pdf, componentlink2description="DigiKey Link", componentlink2url=http://digikey.com/product-detail/en/panasonic-electronic-components/EEU-FR1H470/P124235-ND/9921029, Height - Seated (Max)="0.500\" (12.70mm)", Impedance="140 mOhms", lastupdated="4/09/2020 1:05:46 AM", Lead Spacing="0.098\" (2.50mm)", Lifecycle Status=Active, Minimum Order=1, Mounting Type="Through Hole", Package / Case="Radial, Can", packaging=Bulk, Part Number=EEU-FR1H470, Part Status=Active, partid=20220, Polarization=Polar, price=0.31, series=FR, Size / Dimension="0.248\" Dia (6.30mm)", Supplier 1=DigiKey
C6: library part C1206C473K5RECAUTO, "CAP CER 1206 47NF 50V X7R 10%", Device Package="1206 (3216 Metric)", manufacturer=KEMET, Operating Temperature="-55°C ~ 125°C", Ratings=AEC-Q200, Supplier Part Number 1=399-17893-1-ND, Temperature Coefficient=X7R, Tolerance=±10%, Voltage - Rated=50V, Applications="Automotive, ESD Protection", Capacitance="0.047 µF", componentlink1description=Datasheet, componentlink1url=https://api.kemet.com/component-edge/download/datasheet/C1206C473K5RECAUTO.pdf, componentlink2description="DigiKey Link", componentlink2url=https://www.digikey.com/en/products/detail/kemet/C1206C473K5RECAUTO/8640487, lastupdated="9/02/2024 8:18:49 PM", Lifecycle Status=Active, Minimum Order=1, Mounting Type="Surface Mount, MLCC", Package / Case="1206 (3216 Metric)", packaging=TapeAndReel, Part Number=C1206C473K5RECAUTO, Part Status=Active, partid=19026, price=0.03, series="ESD SMD Auto X7R", Size / Dimension="0.126\" L x 0.063\" W (3.20mm x 1.60mm)", Supplier 1=DigiKey, Thickness (Max)="0.043\" (1.10mm)"
C7: library part GMC31CG472G50NT, "CAP1206 COG 4700PF 2% 50V", Device Package="1206 (3216 Metric)", manufacturer="Cal-Chip Electronics, Inc.", Operating Temperature="-55°C ~ 125°C", Supplier Part Number 1=4713-GMC31CG472G50NTCT-ND, Temperature Coefficient="C0G, NP0", Tolerance=±2%, Voltage - Rated=50V, Applications="General Purpose", Capacitance="4700 pF", componentlink1description=Datasheet, componentlink1url=https://88ce57.p3cdn1.secureserver.net/wp-content/uploads/2023/01/gmc_series-2.pdf, componentlink2description="DigiKey Link", componentlink2url=https://www.digikey.com/en/products/detail/cal-chip-electronics-inc/GMC31CG472G50NT/19910712, lastupdated="9/02/2024 8:17:50 PM", Lifecycle Status=Active, Minimum Order=1, Mounting Type="Surface Mount, MLCC", Package / Case="1206 (3216 Metric)", packaging=TapeAndReel, Part Number=GMC31CG472G50NT, partid=56643, price=0.05, series=GMC, Size / Dimension="0.126\" L x 0.063\" W (3.20mm x 1.60mm)", Supplier 1=DigiKey, Thickness (Max)="0.037\" (0.95mm)"
C8: library part GCJ32EC71H106KA01L, "CAP CER 10UF 50V X7S 1210", Part Number=GCJ32EC71H106KA01L
C9: library part 12103D226KAT2A, "CAP CER 22UF 25V X5R 1210", Part Number=12103D226KAT2A
C10 C22: library part "CAP MICA 10PF", "CAP MICA 15PF 5% 500V RADIAL", Supplier Part Number 1=338-2618-ND, Supplier 1=Digikey
C16 C21: library part "CAP MICA 27PF", "CAP MICA 27PF 5% 500V RADIAL", Supplier Part Number 1=338-2623-ND, Supplier 1=Digikey
C18: library part C1210J104K2RAC7800, ".100UF  200V", Device Package="1210 (3225 Metric)", manufacturer=KEMET, Operating Temperature="-55°C ~ 125°C", Supplier Part Number 1=399-C1210J104K2RAC7800CT-ND, Temperature Coefficient=X7R, Tolerance=±10%, Voltage - Rated=200V, Applications="Boardflex Sensitive", Capacitance="0.1 µF", componentlink1description=Datasheet, componentlink1url=https://connect.kemet.com:7667/gateway/IntelliData-ComponentDocumentation/1.0/download/datasheet/C1210J104K2RAC7800, componentlink2description="DigiKey Link", componentlink2url=https://www.digikey.com/en/products/detail/kemet/C1210J104K2RAC7800/12082491, Features="Open Mode, Soft Termination", lastupdated="4/06/2024 7:20:48 PM", Lifecycle Status=Active, Minimum Order=1, Mounting Type="Surface Mount, MLCC", Package / Case="1210 (3225 Metric)", packaging=TapeAndReel, Part Number=C1210J104K2RAC7800, Part Status=Active, partid=49670, price=0.24, series="SMD Comm X7R FO", Size / Dimension="0.130\" L x 0.102\" W (3.30mm x 2.60mm)", Supplier 1=DigiKey, Thickness (Max)="0.057\" (1.45mm)"
C19: library part UMF1V010MDD, "CAP ALUM 1UF 20% 35V RADIAL", Device Package="Radial, Can", Lifetime @ Temp.="1000 Hrs @ 105°C", manufacturer=Nichicon, Operating Temperature="-55°C ~ 105°C", Ripple Current @ High Frequency="50mA @ 100kHz", Ripple Current @ Low Frequency="25mA @ 120Hz", Supplier Part Number 1=493-15541-ND, Tolerance=±20%, Voltage - Rated=35V, Applications="General Purpose", Capacitance=1µF, componentlink1description=Datasheet, componentlink1url=http://nichicon-us.com/english/products/pdfs/e-umf.pdf, componentlink2description="DigiKey Link", componentlink2url=http://digikey.com/product-detail/en/nichicon/UMF1V010MDD/493-15541-ND/2598666, Height - Seated (Max)="0.236\" (6.00mm)", Impedance="5 Ohms", lastupdated="6/09/2020 1:48:30 AM", Lead Spacing="0.059\" (1.50mm)", Lifecycle Status=Active, Minimum Order=1, Mounting Type="Through Hole", Package / Case="Radial, Can", packaging=Bulk, Part Number=UMF1V010MDD, Part Status=Active, partid=23219, Polarization=Polar, price=0.42, series=UMF, Size / Dimension="0.157\" Dia (4.00mm)", Supplier 1=DigiKey
C20: library part UMF1V4R7MDD, "CAP ALUM 4.7UF 20% 35V RADIAL", Device Package="Radial, Can", Lifetime @ Temp.="1000 Hrs @ 105°C", manufacturer=Nichicon, Operating Temperature="-55°C ~ 105°C", Ripple Current @ High Frequency="50mA @ 100kHz", Ripple Current @ Low Frequency="25mA @ 120Hz", Supplier Part Number 1=493-15545-ND, Tolerance=±20%, Voltage - Rated=35V, Applications="General Purpose", Capacitance=4.7µF, componentlink1description=Datasheet, componentlink1url=http://nichicon-us.com/english/products/pdfs/e-umf.pdf, componentlink2description="DigiKey Link", componentlink2url=http://digikey.com/product-detail/en/nichicon/UMF1V4R7MDD/493-15545-ND/2598673, Height - Seated (Max)="0.236\" (6.00mm)", Impedance="5 Ohms", lastupdated="6/09/2020 1:48:30 AM", Lead Spacing="0.059\" (1.50mm)", Lifecycle Status=Active, Minimum Order=1, Mounting Type="Through Hole", Package / Case="Radial, Can", packaging=Bulk, Part Number=UMF1V4R7MDD, Part Status=Active, partid=23153, Polarization=Polar, price=0.42, series=UMF, Size / Dimension="0.157\" Dia (4.00mm)", Supplier 1=DigiKey
C23 C24 C25 C26 C27: library part GMC32X7R104K100NT, "CAP1210 X7R .1UF 10% 100V", Device Package="1210 (3225 Metric)", manufacturer="Cal-Chip Electronics, Inc.", Operating Temperature="-55°C ~ 125°C", Supplier Part Number 1=4713-GMC32X7R104K100NTCT-ND, Temperature Coefficient=X7R, Tolerance=±10%, Voltage - Rated=100V, Applications="General Purpose", Capacitance="0.1 µF", componentlink1description=Datasheet, componentlink1url=https://calchip.com/wp-content/uploads/2023/05/gmc_series.pdf, componentlink2description="DigiKey Link", componentlink2url=https://www.digikey.com/en/products/detail/cal-chip-electronics-inc/GMC32X7R104K100NT/21802075, lastupdated="4/06/2024 7:20:42 PM", Lifecycle Status=Active, Minimum Order=1, Mounting Type="Surface Mount, MLCC", Package / Case="1210 (3225 Metric)", packaging=TapeAndReel, Part Number=GMC32X7R104K100NT, partid=58440, price=0.05, series=GMC, Size / Dimension="0.126\" L x 0.098\" W (3.20mm x 2.50mm)", Supplier 1=DigiKey, Thickness (Max)="0.087\" (2.20mm)"
C28 C29 C30: library part GMC32X7R105K25NT, "CAP1210 X7R 1UF 10% 25V", Device Package="1210 (3225 Metric)", manufacturer="Cal-Chip Electronics, Inc.", Operating Temperature="-55°C ~ 125°C", Supplier Part Number 1=4713-GMC32X7R105K25NTCT-ND, Temperature Coefficient=X7R, Tolerance=±10%, Voltage - Rated=25V, Applications="General Purpose", Capacitance="1 µF", componentlink1description=Datasheet, componentlink1url=https://88ce57.p3cdn1.secureserver.net/wp-content/uploads/2023/01/gmc_series-2.pdf, componentlink2description="DigiKey Link", componentlink2url=https://www.digikey.com/en/products/detail/cal-chip-electronics-inc/GMC32X7R105K25NT/19910714, lastupdated="4/06/2024 7:20:43 PM", Lifecycle Status=Active, Minimum Order=1, Mounting Type="Surface Mount, MLCC", Package / Case="1210 (3225 Metric)", packaging=TapeAndReel, Part Number=GMC32X7R105K25NT, partid=56654, price=0.06, series=GMC, Size / Dimension="0.126\" L x 0.098\" W (3.20mm x 2.50mm)", Supplier 1=DigiKey, Thickness (Max)="0.071\" (1.80mm)"
D1: "DIODE GEN PURP 40V 100MA SC70-3", Current - Average Rectified (Io)="100mA (DC)", Current - Reverse Leakage @ Vr="100nA @ 35V", manufacturer="ON Semiconductor", Operating Temperature - Junction="150°C (Max)", Package / Case="SC-70, SOT-323", Supplier Device Package="SC-70-3 (SOT323)", Supplier Part Number 1=M1MA141KT1GOSCT-ND, Voltage - DC Reverse (Vr) (Max)=40V, Voltage - Forward (Vf) (Max) @ If="1.2V @ 100mA", componentlink1description=Datasheet, componentlink1url=http://www.onsemi.com/pub/Collateral/M1MA141KT1-D.PDF, componentlink2description="DigiKey Link", componentlink2url=http://digikey.com/product-detail/en/on-semiconductor/M1MA141KT1G/M1MA141KT1GOSCT-ND/917953, Diode Type=Standard, lastupdated="8/02/2024 9:34:01 PM", Lifecycle Status=Active, Minimum Order=1, Mounting Type="Surface Mount", packaging=TapeAndReel, Part Number=M1MA141KT1G, Part Status=Active, partid=8, price=0.03, Reverse Recovery Time (trr)=3ns, series=-, Speed="Small Signal =< 200mA (Io), Any Speed", Supplier 1=DigiKey
D2 D4 D8 D9: "DIODE SCHOTTKY 40V 1A SMB", Current - Average Rectified (Io)=1A, Current - Reverse Leakage @ Vr="1mA @ 40V", manufacturer="ON Semiconductor", Operating Temperature - Junction="-65°C ~ 125°C", Package / Case="DO-214AA, SMB", Supplier Device Package=SMB, Supplier Part Number 1=MBRS140T3GOSCT-ND, Voltage - DC Reverse (Vr) (Max)=40V, Voltage - Forward (Vf) (Max) @ If="600mV @ 1A", componentlink1description=Datasheet, componentlink1url=https://www.onsemi.com/pub/Collateral/MBRS140T3-D.PDF, componentlink2description="DigiKey Link", componentlink2url=http://digikey.com/product-detail/en/on-semiconductor/MBRS140T3G/MBRS140T3GOSCT-ND/918002, Diode Type=Schottky, lastupdated="8/02/2024 9:26:46 PM", Lifecycle Status=Active, Minimum Order=1, Mounting Type="Surface Mount", packaging=TapeAndReel, Part Number=MBRS140T3G, Part Status=Active, partid=1387, price=0.08, series=-, Speed="Fast Recovery =< 500ns, > 200mA (Io)", Supplier 1=DigiKey
D3: "DIODE GEN PURP 100V 300MA SOD123", Capacitance @ Vr, F="2pF @ 0V, 1MHz", Current - Average Rectified (Io)=300mA, Current - Reverse Leakage @ Vr="1 µA @ 100 V", manufacturer="Diodes Incorporated", Operating Temperature - Junction="-55°C ~ 150°C", Package / Case=SOD-123, Supplier Part Number 1=1N4148W-FDICT-ND, Voltage - DC Reverse (Vr) (Max)="100 V", Voltage - Forward (Vf) (Max) @ If="1.25 V @ 150 mA", componentlink1description=Datasheet, componentlink1url=https://www.diodes.com/assets/Datasheets/ds30086.pdf, componentlink2description="DigiKey Link", componentlink2url=https://www.digikey.com/en/products/detail/diodes-incorporated/1N4148W-7-F/814371, Diode Type=Standard, lastupdated="8/02/2024 9:27:29 PM", Lifecycle Status=Active, Minimum Order=1, Mounting Type="Surface Mount", packaging=TapeAndReel, Part Number=1N4148W-7-F, Part Status=Active, partid=1002, price=0.02, Reverse Recovery Time (trr)="4 ns", series=-, Speed="Fast Recovery =< 500ns, > 200mA (Io)", Supplier 1=DigiKey, Supplier Device Package=SOD-123
D5 D6 D7 D10 D11 D12 D13: library part XZVG60W, "LED GREEN CLEAR 2SMD", Current - Test=20mA, Device Package="1206 (3216 Metric)", Lens Color=Colorless, manufacturer=SunLED, Millicandela Rating=118mcd, Supplier Device Package=2-SMD, Supplier Part Number 1=1497-1398-1-ND, Voltage - Forward (Vf) (Typ)=2.1V, Color=Green, componentlink1description=Datasheet, componentlink1url=https://www.sunledusa.com/products/spec/XZVG60W.pdf, componentlink2description="DigiKey Link", componentlink2url=https://www.digikey.com/en/products/detail/sunled/XZVG60W/4902123, Configuration=Standard, Height (Max)=1.40mm, lastupdated="3/06/2024 7:59:11 PM", Lens Size="2.00mm x 1.50mm", Lens Style="Rectangle with Flat Top", Lens Transparency=Clear, Lifecycle Status=Active, Minimum Order=1, Mounting Type="Surface Mount", Package / Case="1206 (3216 Metric)", packaging=TapeAndReel, Part Number=XZVG60W, Part Status=Active, partid=1002, price=0.07, series=-, Size / Dimension="3.00mm L x 1.50mm W", Supplier 1=DigiKey, Viewing Angle=70°, Wavelength - Dominant=570nm, Wavelength - Peak=574nm
D14: library part XZUY54W-1, "LED YELLOW CLEAR CHIP SMD", Current - Test=20mA, Device Package="0805 (2012 Metric)", Lens Color=Colorless, manufacturer=SunLED, Millicandela Rating=7mcd, Supplier Device Package="Chip LED", Supplier Part Number 1=1497-1210-1-ND, Voltage - Forward (Vf) (Typ)=2.1V, Color=Yellow, componentlink1description=Datasheet, componentlink1url=https://www.sunledusa.com/products/spec/XZUY54W-1.pdf, componentlink2description="DigiKey Link", componentlink2url=https://www.digikey.com/en/products/detail/sunled/XZUY54W-1/4745811, Configuration=Standard, Height (Max)=0.75mm, lastupdated="3/06/2024 8:01:27 PM", Lens Size="1.20mm x 1.25mm", Lens Style="Rectangle with Flat Top", Lens Transparency=Clear, Lifecycle Status=Active, Minimum Order=1, Mounting Type="Surface Mount", Package / Case="0805 (2012 Metric)", packaging=TapeAndReel, Part Number=XZUY54W-1, Part Status=Active, partid=43, price=0.04, series=-, Size / Dimension="2.00mm L x 1.25mm W", Supplier 1=DigiKey, Viewing Angle=120°, Wavelength - Dominant=588nm, Wavelength - Peak=590nm
DS1: "Graphic LCD Display Module Transflective Black (White - Inverted) FSTN - Film Super-Twisted Nematic SPI 128 x 32", Package=None, Availability=Good, Check_prices=https://www.snapeda.com/parts/NHD-C12832A1Z-FSW-FBW-3V3/Newhaven%20Display%20Intl/view-part/275499/?ref=eda, MF=Newhaven, MP=NHD-C12832A1Z-FSW-FBW-3V3, price=None, Purchase-URL=https://pricing.snapeda.com/search/part/NHD-C12832A1Z-FSW-FBW-3V3/?ref=eda, SnapEDA_Link=https://www.snapeda.com/parts/NHD-C12832A1Z-FSW-FBW-3V3/Newhaven%20Display%20Intl/view-part/275499/?ref=snap
IC1: "IC REG LINEAR 3.3V 800MA SOT223", Current - Output=800mA, Current - Quiescent (Iq)="10 mA", manufacturer=STMicroelectronics, Operating Temperature="0°C ~ 125°C", Package / Case="TO-261-4, TO-261AA", Supplier Device Package=SOT-223, Supplier Part Number 1=497-1242-1-ND, Voltage - Input (Max)=15V, Voltage - Output (Min/Fixed)=3.3V, Voltage Dropout (Max)="1.2V @ 800mA", componentlink1description=Datasheet, componentlink1url=http://www.st.com/content/ccc/resource/technical/document/datasheet/99/3b/7d/91/91/51/4b/be/CD00000544.pdf/files/CD00000544.pdf/jcr:content/translations/en.CD00000544.pdf, componentlink2description="DigiKey Link", componentlink2url=https://www.digikey.com/en/products/detail/stmicroelectronics/LD1117S33TR/585766, lastupdated="3/06/2024 8:14:20 PM", Lifecycle Status=Active, Minimum Order=1, Mounting Type="Surface Mount", Number of Regulators=1, Output Configuration=Positive, Output Type=Fixed, packaging=TapeAndReel, Part Number=LD1117S33TR, Part Status=Active, price=0.13, Protection Features="Over Current, Over Temperature", PSRR="75dB (120Hz)", series=-, Supplier 1=DigiKey
IC2: "IC REG MULT CONFG ADJ 1.5A 8SOIC", Current - Output="1.5A (Switch)", Device Package="8-SOIC (0.154\", 3.90mm Width)", Frequency - Switching=280kHz, manufacturer="ON Semiconductor", Operating Temperature="-40°C ~ 125°C (TJ)", Supplier Device Package=8-SOIC, Supplier Part Number 1=CS5171EDR8GOSTR-ND, Voltage - Input (Max)=30V, Voltage - Input (Min)=2.7V, Voltage - Output (Max)="40V (Switch)", Voltage - Output (Min/Fixed)=1.28V, componentlink1description=Datasheet, componentlink1url=http://www.onsemi.com/pub/Collateral/CS5171-D.PDF, componentlink2description="DigiKey Link", componentlink2url=//digikey.com/product-detail/en/on-semiconductor/CS5171EDR8G/CS5171EDR8GOSTR-ND/918422, Function="Step-Up, Step-Down, Step-Up/Step-Down", lastupdated="12/12/2019 8:27:18 AM", Lifecycle Status=0, Minimum Order=1, Mounting Type="Surface Mount", Number of Outputs=1, Output Configuration="Positive or Negative", Output Type=Adjustable, Package / Case="8-SOIC (0.154\", 3.90mm Width)", packaging=TapeAndReel, Part Number=CS5171EDR8G, Part Status=Active, price=0.97, series=-, Supplier 1=DigiKey, Synchronous Rectifier=No, Topology="Buck, Boost, Flyback, Forward Converter, SEPIC"
IC3: "IC REG LINEAR 5V 150MA SOT23-5", Current - Output=150mA, Current - Quiescent (Iq)="100 µA", Current - Supply (Max)="140 µA", manufacturer="Texas Instruments", Operating Temperature="-40°C ~ 125°C", Package / Case="SC-74A, SOT-753", Supplier Device Package=SOT-23-5, Supplier Part Number 1=296-11023-1-ND, Voltage - Input (Max)=10V, Voltage - Output (Min/Fixed)=5V, Voltage Dropout (Max)="0.3V @ 150mA", componentlink1description=Datasheet, componentlink1url=http://www.ti.com/general/docs/suppproductinfo.tsp?distId=10&gotoUrl=http%3A%2F%2Fwww.ti.com%2Flit%2Fgpn%2Ftps763, componentlink2description="DigiKey Link", componentlink2url=https://www.digikey.com/en/products/detail/texas-instruments/TPS76350DBVR/382163, Control Features=Enable, lastupdated="3/06/2024 8:14:19 PM", Lifecycle Status=Active, Minimum Order=1, Mounting Type="Surface Mount", Number of Regulators=1, Output Configuration=Positive, Output Type=Fixed, packaging=TapeAndReel, Part Number=TPS76350DBVR, Part Status=Active, price=0.22, Protection Features="Over Current, Over Temperature, Reverse Polarity", PSRR="60dB (1kHz)", series=-, Supplier 1=DigiKey
IC4 IC5: "IC OPAMP GP 2 CIRCUIT 8SOIC", Current - Input Bias=20nA, Current - Output / Channel=30mA, Current - Supply=1mA, Device Package="8-SOIC (0.154\", 3.90mm Width)", manufacturer="Texas Instruments", Operating Temperature="-40°C ~ 125°C", Supplier Device Package=8-SOIC, Supplier Part Number 1=296-14596-1-ND, Voltage - Input Offset=3mV, Voltage - Supply, Single/Dual (±)="3V ~ 26V, ±1.5V ~ 13V", Amplifier Type="General Purpose", componentlink1description=Datasheet, componentlink1url=http://www.ti.com/general/docs/suppproductinfo.tsp?distId=10&gotoUrl=http%3A%2F%2Fwww.ti.com%2Flit%2Fgpn%2Flm258a, componentlink2description="DigiKey Link", componentlink2url=http://digikey.com/product-detail/en/texas-instruments/LM2904DR/296-14596-1-ND/555533, Gain Bandwidth Product=700kHz, lastupdated="9/01/2020 2:06:28 AM", Lifecycle Status=Active, Minimum Order=1, Mounting Type="Surface Mount", Number of Circuits=2, Package / Case="8-SOIC (0.154\", 3.90mm Width)", packaging=ReReel, Part Number=LM2904DR, Part Status=Active, partid=4, price=0.00, series=-, Slew Rate=0.3V/µs, Supplier 1=DigiKey
IC6 IC8: "IC DAC 8BIT V-OUT 8VSSOP", Part Number=DAC081S101CIMM/NOPB
IC7 IC11: "IC DGTL POT 100KOHM 256TAP SOT23", manufacturer="Analog Devices Inc.", Operating Temperature="-40°C ~ 125°C", Package / Case=SOT-23-8, Resistance (Ohms)=100k, Resistance - Wiper (Ohms) (Typ)=50, Supplier Part Number 1=AD5160BRJZ100-R2CT-ND, Temperature Coefficient (Typ)=45ppm/°C, Tolerance=±15%, Voltage - Supply="2.7V ~ 5.5V", componentlink1description=Datasheet, componentlink1url=https://www.analog.com/media/en/technical-documentation/data-sheets/AD5160.pdf, componentlink2description="DigiKey Link", componentlink2url=http://digikey.com/product-detail/en/analog-devices-inc/AD5160BRJZ100-R2/AD5160BRJZ100-R2CT-ND/751230, Configuration=Potentiometer, Interface=SPI, lastupdated="3/06/2024 8:26:31 PM", Lifecycle Status=Active, Memory Type=Volatile, Minimum Order=1, Number of Circuits=1, Number of Taps=256, packaging=TapeAndReel, Part Number=AD5160BRJZ100-R2, Part Status=Active, partid=39, price=1.68, series=-, Supplier 1=DigiKey, Supplier Device Package=SOT-23-8, Taper=Linear
J1: "CONN HEADER R/A 6POS 2.5MM", Insulation Color=Black, manufacturer=Molex, Operating Temperature="-40°C ~ 105°C", Supplier Part Number 1=WM16897-ND, componentlink1description=Datasheet, componentlink1url=https://www.molex.com/pdm_docs/ps/PS-105300-100-001.pdf, componentlink2description="DigiKey Link", componentlink2url=https://www.digikey.com/en/products/detail/molex/1053131106/7693178, Connector Type=Header, Contact Finish - Mating=Tin, Contact Finish - Post=Tin, Contact Finish Thickness - Mating="59.0µin (1.50µm)", Contact Length - Post="0.126\" (3.20mm)", Contact Material=Brass, Contact Shape=Square, Contact Type="Male Pin", Fastening Type="Latch Holder", Features="Board Guide", Insulation Height="0.149\" (3.78mm)", Insulation Material="Liquid Crystal Polymer (LCP)", lastupdated="11/08/2022 9:49:49 AM", Lifecycle Status=Active, Minimum Order=1, Mounting Type="Through Hole, Right Angle", Number of Positions=6, Number of Positions Loaded=All, Number of Rows=1, packaging=Tray, Part Number=1053131106, Part Status=Active, partid=145, Pitch - Mating="0.098\" (2.50mm)", price=0.75, Row Spacing - Mating="-40°C ~ 105°C", series="Nano-Fit 105313", Shrouding="Shrouded - 4 Wall", Style="Board to Cable/Wire", Supplier 1=DigiKey, Termination=Solder
J2: "CONN PWR JACK 2X5.5MM SOLDER", Current Rating (Amps)=5A, manufacturer="CUI Devices", Material Flammability Rating="UL94 V-0", Supplier Part Number 1=CP-102AH-ND, Voltage - Rated=24VDC, Actual Diameter="0.079\" (2.00mm ID), 0.256\" (6.50mm OD)", componentlink1description=Datasheet, componentlink1url=https://www.cuidevices.com/product/resource/digikeypdf/pj-102ah.pdf, componentlink2description="DigiKey Link", componentlink2url=//digikey.com/product-detail/en/cui-devices/PJ-102AH/CP-102AH-ND/408448, Connector Type=Jack, Gender=Male, Industry Recognized Mating Diameter="2.00mm ID (0.079\"), 5.50mm OD (0.217\")", Internal Switch(s)="Single Switch, Normally Closed", lastupdated="16/12/2019 7:01:27 PM", Lifecycle Status=0, Mating Length/Depth="0.354\" (9.00mm)", Minimum Order=1, Mounting Type="Through Hole, Right Angle", Number of Positions/Contacts="2 Conductors, 3 Contacts", packaging=Tray, Part Number=PJ-102AH, Part Status=Active, price=0.76, series=-, Shielding=Unshielded, Supplier 1=DigiKey, Termination=Solder
J3: "28-Pin, 16KB Flash, 4KB RAM, 12 MIPS, nanoWatt", Package="SPDIP-28 Microchip", Check_prices=https://www.snapeda.com/parts/PIC18F24J11-I/SP/Microchip/view-part/?ref=eda, MF=Microchip, MP=PIC18F24J11-I/SP, SnapEDA_Link=https://www.snapeda.com/parts/PIC18F24J11-I/SP/Microchip/view-part/?ref=snap
J5 J6: "Straight SMA Connector", Package=None, Availability=Unavailable, MP=altium_native_batch, price=None
P1 P2 P3: "Header, 2-Pin", LatestRevisionDate=17-Jul-2002, LatestRevisionNote="Re-released for DXP Platform.", Publisher="Altium Limited"
R1: library part CRCW1210715RFKEA, "RES SMD 715 OHM 1% 1/2W 1210", Device Package="1210 (3225 Metric)", manufacturer="Vishay Dale", Operating Temperature="-55°C ~ 155°C", Power (Watts)="0.5W, 1/2W", Ratings=AEC-Q200, Supplier Device Package=1210, Supplier Part Number 1=541-715AACT-ND, Temperature Coefficient=±100ppm/°C, Tolerance=±1%, componentlink1description=Datasheet, componentlink1url=http://www.vishay.com/docs/20035/dcrcwe3.pdf, componentlink2description="DigiKey Link", componentlink2url=https://www.digikey.com/en/products/detail/vishay-dale/CRCW1210715RFKEA/1177340, Composition="Thick Film", Features="Automotive AEC-Q200", Height - Seated (Max)="0.024\" (0.60mm)", lastupdated="8/02/2024 9:49:36 PM", Lifecycle Status=Active, Minimum Order=1, Number of Terminations=2, Package / Case="1210 (3225 Metric)", packaging=TapeAndReel, Part Number=CRCW1210715RFKEA, Part Status=Active, price=0.02, Resistance="715 Ohms", series=CRCW, Size / Dimension="0.126\" L x 0.098\" W (3.20mm x 2.50mm)", Supplier 1=DigiKey
R2: library part ERJ-P14D1002U, "RES SMD 10K OHM 0.5% 1/2W 1210", Device Package="1210 (3225 Metric)", manufacturer="Panasonic Electronic Components", Operating Temperature="-55°C ~ 155°C", Power (Watts)="0.5W, 1/2W", Ratings=AEC-Q200, Supplier Device Package=1210, Supplier Part Number 1=P16083CT-ND, Temperature Coefficient=±100ppm/°C, Tolerance=±0.5%, componentlink1description=Datasheet, componentlink1url=https://industrial.panasonic.com/cdbs/www-data/pdf/RDO0000/AOA0000C331.pdf, componentlink2description="DigiKey Link", componentlink2url=https://www.digikey.com/en/products/detail/panasonic-electronic-components/ERJ-P14D1002U/3982725, Composition="Thick Film", Features="Automotive AEC-Q200, Pulse Withstanding", Height - Seated (Max)="0.028\" (0.70mm)", lastupdated="8/02/2024 9:49:31 PM", Lifecycle Status=Active, Minimum Order=1, Number of Terminations=2, Package / Case="1210 (3225 Metric)", packaging=TapeAndReel, Part Number=ERJ-P14D1002U, Part Status=Active, price=0.07, Resistance="10 kOhms", series=ERJ-P14, Size / Dimension="0.126\" L x 0.098\" W (3.20mm x 2.50mm)", Supplier 1=DigiKey
R3: library part ERJ-14NF1271U, "RES SMD 1.27K OHM 1% 1/2W 1210", Device Package="1210 (3225 Metric)", manufacturer="Panasonic Electronic Components", Operating Temperature="-55°C ~ 155°C", Power (Watts)="0.5W, 1/2W", Ratings=AEC-Q200, Supplier Device Package=1210, Supplier Part Number 1=P1.27KAACT-ND, Temperature Coefficient=±100ppm/°C, Tolerance=±1%, componentlink1description=Datasheet, componentlink1url=https://industrial.panasonic.com/cdbs/www-data/pdf/RDA0000/AOA0000C304.pdf, componentlink2description="DigiKey Link", componentlink2url=https://www.digikey.com/en/products/detail/panasonic-electronic-components/ERJ-14NF1271U/383860, Composition="Thick Film", Features="Automotive AEC-Q200", Height - Seated (Max)="0.028\" (0.70mm)", lastupdated="8/02/2024 9:49:38 PM", Lifecycle Status=Active, Minimum Order=1, Number of Terminations=2, Package / Case="1210 (3225 Metric)", packaging=TapeAndReel, Part Number=ERJ-14NF1271U, Part Status=Active, price=0.03, Resistance="1.27 kOhms", series=ERJ-14N, Size / Dimension="0.126\" L x 0.098\" W (3.20mm x 2.50mm)", Supplier 1=DigiKey